# Altium PCB robot.PCBDOC (part 2 of 2)
Units mm, origin at the board's own origin, x right, y up, seen from the top; angles counter-clockwise.
Board outline 152.4 x 101.6 mm, 2 copper layers (Top Layer, Bottom Layer); 107 components, 0 nets, 589 pads, 29 vias.
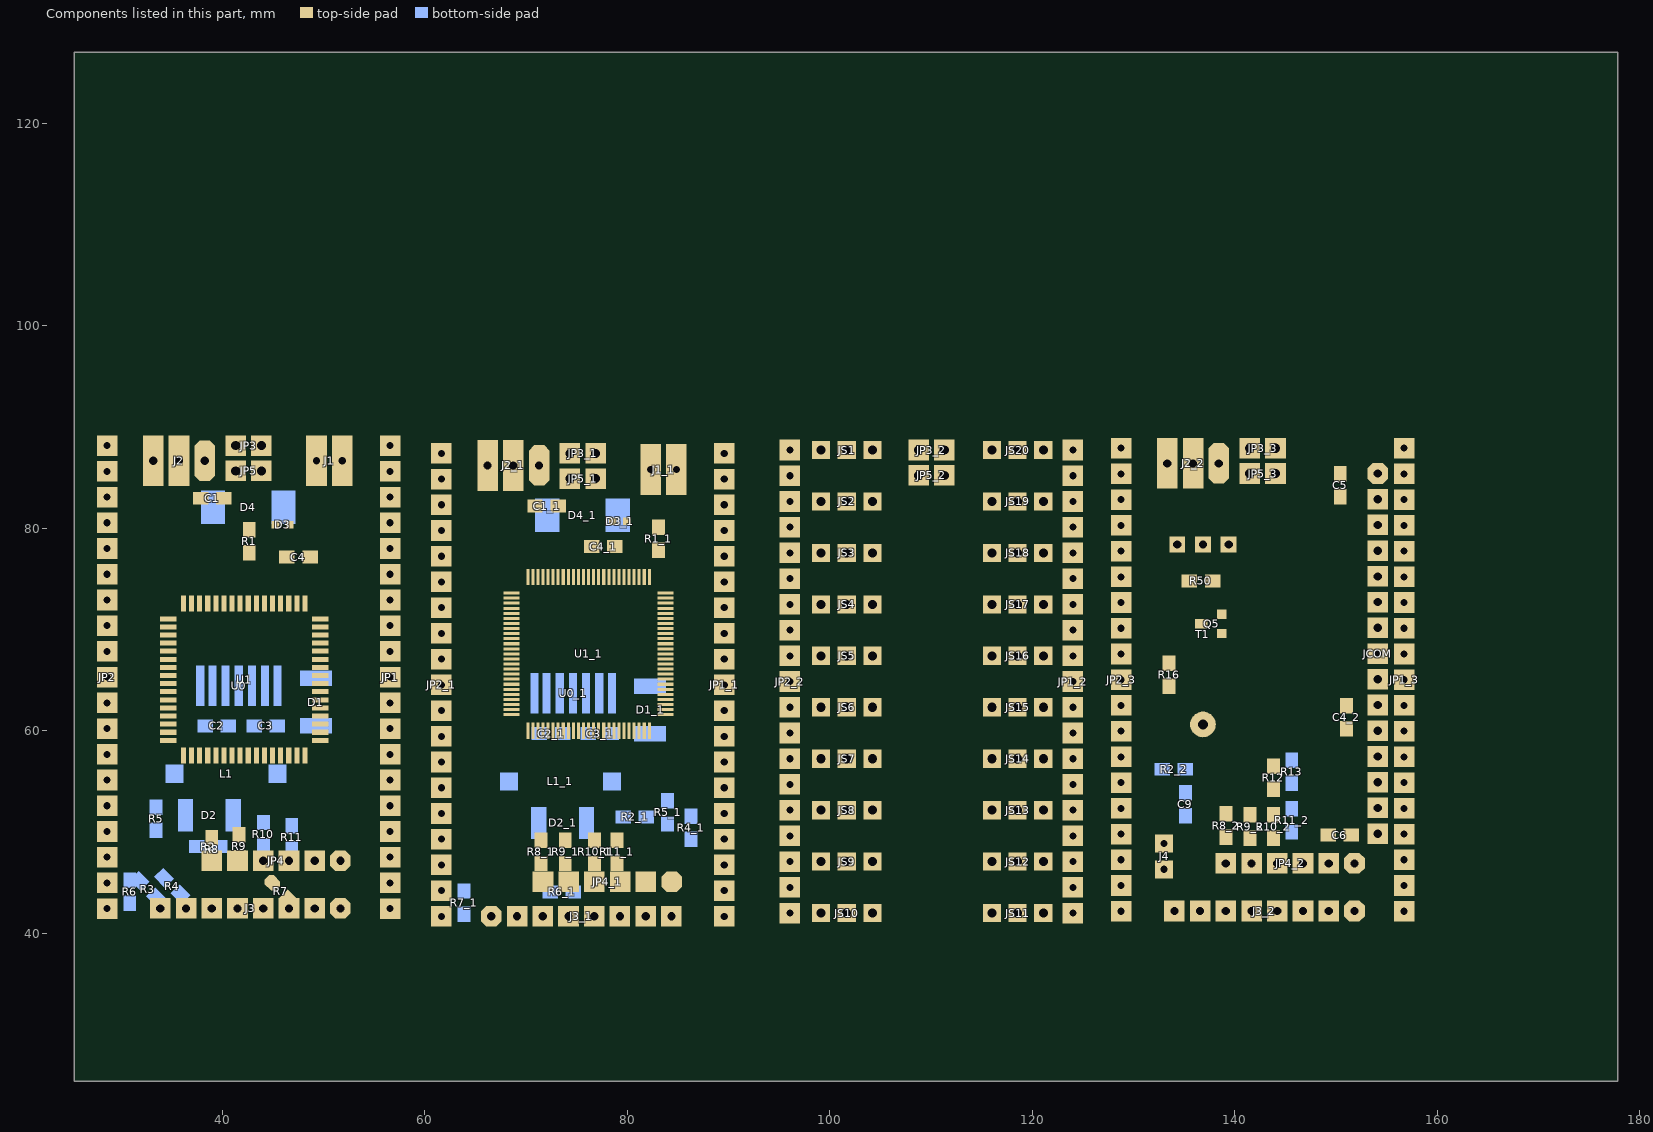
[diagram p2: the components of this part, seen from the top]

## Via types
v1: diameter 1.5, hole 0.711, Top Layer to Bottom Layer, 15 vias
v2: diameter 1.7, hole 0.711, Top Layer to Bottom Layer, 6 vias
v3: diameter 2, hole 0.711, Top Layer to Bottom Layer, 5 vias
v4: diameter 1.8, hole 0.711, Top Layer to Bottom Layer, 2 vias
v5: diameter 1.27, hole 0.711, Top Layer to Bottom Layer, 1 vias

## Nets (pads, with @x,y where several pads share a name; then routed paths per layer and width w, separated by ;. In a path a pad name is that pad's centre, name@x,y a point inside that pad or via, vN(x,y) a via of type N, cw(c..) or ccw(c..) an arc to the next point about the centre after c; other vN are vias at no path point) (continued)
copper on no net: | length 3778.3
  Top Layer w0.3: v1(63.979,59.1) 64.379,58.7 70.379,58.7 70.679,59 70.679,60 ; v1(68.579,49.1) 66.779,49.1 64.379,46.7 64.379,43.8 62.259,41.68 ; 68.579,62.1 70.479,62.1 70.479,70.8 70.179,71.1 67.579,71.1 67.079,71.6 67.079,74.4 67.579,74.9 68.879,74.9 70.479,73.3 76.479,73.3 76.679,73.5 76.679,78 76.479,78.2 76.479,79.8 77.458,80.779 77.9,80.779 ; 68.579,62.6 66.779,62.6 66.679,62.5 66.679,61.8 66.879,61.6 74.679,61.6 ; 68.579,71.6 77.179,71.6 77.179,75.2 ; 69.119,43.4 81.799,43.4 81.839,43.44 81.839,45.1 ; v1@69.119,47.04 v1(69.179,47.1) ; 71.079,61.6 71.079,71.6 ; 71.479,46.9 71.479,45.3 71.679,45.1 ; 71.479,49.186 71.479,51.7 73.679,53.9 73.679,60 ; 73.879,46.9 74.219,46.56 74.219,45.1 ; 73.879,49.186 73.879,51.9 74.179,52.2 74.179,60 ; v1(75.179,50.7) 75.179,50.9 74.679,51.4 74.679,62.7 76.079,64.1 83.779,64.1 ; 75.679,60 75.679,52.2 76.759,51.12 76.759,49.206 76.779,49.186 ; 76.179,60 76.179,52.8 77.537,51.442 78.379,50.6 78.979,50 78.979,49.186 ; 76.759,45.1 76.779,45.12 76.779,46.9 ; 77.179,60 77.179,53.6 80.779,50 v1(80.779,48.1) ; 77.779,82.2 77.779,80.9 77.979,80.7 78.582,80.7 ; 78.979,46.9 78.979,45.42 79.299,45.1 ; 80.179,60 80.179,57.2 82.283,55.096 84.083,55.096 84.579,54.6 v1(87.179,54.6) ; 80.679,60 80.679,57.8 82.579,55.9 v1(85.579,55.9) ; 83.779,63.6 v1(85.779,63.6) ; 61.64,41.68 62.259,41.68 ; 61.64,41.68 62.259,41.68 ; 61.64,41.68 62.259,41.68 ; 61.64,46.76 62.439,46.76 ; 61.64,46.76 62.439,46.76 ; 61.64,46.76 62.439,46.76 ; 61.64,51.84 68.519,51.84 ; 61.64,51.84 68.519,51.84 ; 61.64,51.84 68.519,51.84 ; 61.64,56.92 62.059,56.92 ; 61.64,56.92 62.059,56.92 ; 61.64,56.92 62.059,56.92 ; 61.64,62 65.279,62 ; 61.64,62 65.279,62 ; 61.64,62 65.279,62 ; 61.64,67.08 62.899,67.08 ; 61.64,67.08 62.899,67.08 ; 61.64,67.08 62.899,67.08 ; 61.64,72.16 61.919,72.16 ; 61.64,72.16 61.919,72.16 ; 61.64,72.16 61.919,72.16 ; 61.64,77.24 62.439,77.24 ; 61.64,77.24 62.439,77.24 ; 61.64,77.24 62.439,77.24 ; 61.64,82.32 63.359,82.32 ; 61.64,82.32 63.359,82.32 ; 61.64,82.32 63.359,82.32 ; 61.64,87.4 63.079,87.4 ; 61.64,87.4 63.079,87.4 ; 61.64,87.4 63.079,87.4 ; 61.919,72.16 64.479,69.6 64.479,64.4 65.279,63.6 ; 62.059,56.92 64.079,54.9 69.379,54.9 72.179,57.7 ; 62.439,46.76 66.179,50.5 68.879,50.5 73.179,54.8 ; 62.439,77.24 63.979,75.7 63.979,71.4 65.379,70 65.379,64.8 66.079,64.1 ; 62.899,67.08 63.579,66.4 63.579,64 64.479,63.1 ; 63.079,87.4 63.579,86.9 63.579,83.9 64.679,82.8 64.679,78.4 65.679,77.4 65.679,72 67.079,70.6 67.079,65.6 67.579,65.1 ; 63.359,82.32 63.779,81.9 63.779,77.7 64.879,76.6 64.879,71.7 66.279,70.3 66.279,65.2 66.879,64.6 ; v1(64.079,56.9) 70.079,56.9 ; v1(64.079,56.9) 70.079,56.9 ; v1(64.079,56.9) 70.079,56.9 ; 64.479,63.1 68.579,63.1 ; 64.479,63.1 68.579,63.1 ; 64.479,63.1 68.579,63.1 ; 65.279,62 67.279,60 ; 65.279,63.6 68.579,63.6 ; 65.279,63.6 68.579,63.6 ; 65.279,63.6 68.579,63.6 ; 66.079,64.1 68.579,64.1 ; 66.079,64.1 68.579,64.1 ; 66.079,64.1 68.579,64.1 ; 66.579,41.7 v1(66.579,45.9) ; 66.579,41.7 v1(66.579,45.9) ; 66.579,41.7 v1(66.579,45.9) ; 66.879,64.6 68.579,64.6 ; 66.879,64.6 68.579,64.6 ; 66.879,64.6 68.579,64.6 ; 67.279,60 70.179,60 ; 67.279,60 70.179,60 ; 67.279,60 70.179,60 ; 67.579,65.1 68.579,65.1 ; 67.579,65.1 68.579,65.1 ; 67.579,65.1 68.579,65.1 ; 68.519,51.84 69.179,52.5 72.679,56 ; 70.079,56.9 71.179,58 ; 71.179,58 71.179,60 ; 71.179,58 71.179,60 ; 71.179,58 71.179,60 ; 72.179,57.7 72.179,60 ; 72.179,57.7 72.179,60 ; 72.179,57.7 72.179,60 ; 72.679,56 72.679,60 ; 72.679,56 72.679,60 ; 72.679,56 72.679,60 ; 73.179,54.8 73.179,60 ; 73.179,54.8 73.179,60 ; 73.179,54.8 73.179,60 ; 75.179,60 75.179,61.6 ; 75.179,60 75.179,61.6 ; 75.179,60 75.179,61.6 ; 75.179,61.6 76.379,62.8 80.979,62.8 83.579,60.2 ; 77.179,75.2 77.179,76.4 ; 77.179,75.2 77.179,76.4 ; 77.179,75.2 77.179,76.4 ; 77.179,76.4 77.479,76.7 78.479,76.7 78.765,76.986 ; 77.679,55.3 83.279,49.7 85.879,49.7 86.536,49.043 86.536,46.443 87.279,45.7 87.279,42.1 87.699,41.68 ; 77.679,55.3 77.679,60 ; 77.679,55.3 77.679,60 ; 77.679,55.3 77.679,60 ; 78.179,55.966 83.391,50.753 86.326,50.753 87.379,49.7 87.379,47.66 88.279,46.76 ; 78.179,55.966 78.179,60 ; 78.179,55.966 78.179,60 ; 78.179,55.966 78.179,60 ; 78.679,56.566 82.832,52.413 83.405,51.84 ; 78.679,56.566 78.679,60 ; 78.679,56.566 78.679,60 ; 78.679,56.566 78.679,60 ; 78.765,76.986 78.765,78.2 ; 78.765,76.986 78.765,78.2 ; 78.765,76.986 78.765,78.2 ; 79.679,56.7 v1@82.679,53.7 ; 79.679,56.7 79.679,60 ; 79.679,56.7 79.679,60 ; 79.679,56.7 79.679,60 ; 79.979,80.7 82.479,80.7 ; 79.979,80.7 82.479,80.7 ; 79.979,80.7 82.479,80.7 ; 81.179,58.4 82.279,57.3 89.2,57.3 ; 81.179,58.4 81.179,60 ; 81.179,58.4 81.179,60 ; 81.179,58.4 81.179,60 ; 81.679,59 82.579,58.1 87.079,58.1 87.879,58.9 87.879,60.7 88.479,61.3 89.179,62 ; 81.679,59 81.679,60 ; 81.679,59 81.679,60 ; 81.679,59 81.679,60 ; 82.179,59.8 83.179,58.8 86.679,58.8 87.092,59.213 87.092,61.113 87.779,61.8 87.779,66.6 88.259,67.08 ; 82.179,59.8 82.179,60 ; 82.179,59.8 82.179,60 ; 82.179,59.8 82.179,60 ; 82.179,75.2 82.579,75.2 ; 82.179,75.2 82.579,75.2 ; 82.179,75.2 82.579,75.2 ; 82.479,80.7 83.079,80.1 ; 82.479,80.7 83.079,80.1 ; 82.479,80.7 83.079,80.1 ; 82.579,75.2 83.079,75.7 ; v1@82.679,48 v1@83.179,48 ; v1@82.679,48 v1@83.179,48 ; v1@82.679,48 v1@83.179,48 ; v1@82.679,53.7 v1(83.179,53.7) ; v1@82.679,53.7 v1(83.179,53.7) ; v1@82.679,53.7 v1(83.179,53.7) ; 83.079,75.7 83.079,77.814 ; 83.079,75.7 83.079,77.814 ; 83.079,75.7 83.079,77.814 ; v1@83.179,48 84.379,46.8 ; 83.405,51.84 89.58,51.84 ; 83.405,51.84 89.58,51.84 ; 83.405,51.84 89.58,51.84 ; 83.579,60.2 v1(85.379,60.2) ; 83.579,60.2 v1(85.379,60.2) ; 83.579,60.2 v1(85.379,60.2) ; 83.779,61.6 85.979,61.6 ; 83.779,61.6 85.979,61.6 ; 83.779,61.6 85.979,61.6 ; 83.779,64.6 84.779,64.6 ; 83.779,64.6 84.779,64.6 ; 83.779,64.6 84.779,64.6 ; 83.779,67.6 85.879,67.6 ; 83.779,67.6 85.879,67.6 ; 83.779,67.6 85.879,67.6 ; 83.779,68.1 85.379,68.1 ; 83.779,68.1 85.379,68.1 ; 83.779,68.1 85.379,68.1 ; 83.779,68.6 84.879,68.6 ; 83.779,68.6 84.879,68.6 ; 83.779,68.6 84.879,68.6 ; 84.379,45.1 84.379,46.8 ; 84.379,45.1 84.379,46.8 ; 84.379,45.1 84.379,46.8 ; 84.779,64.6 v1@85.679,65.5 ; 84.879,68.6 85.279,69 85.279,80.4 87.579,82.7 87.579,87 87.979,87.4 ; 85.379,68.1 86.079,68.8 86.079,79.8 88.599,82.32 ; v1@85.679,65.5 v1(85.679,65.8) ; v1@85.679,65.5 v1(85.679,65.8) ; v1@85.679,65.5 v1(85.679,65.8) ; 85.879,67.6 86.879,68.6 86.879,76.5 87.619,77.24 ; 85.979,61.6 86.979,62.6 86.979,67.4 87.679,68.1 87.679,71.6 88.239,72.16 ; 87.619,77.24 89.58,77.24 ; 87.619,77.24 89.58,77.24 ; 87.619,77.24 89.58,77.24 ; 87.699,41.68 89.58,41.68 ; 87.699,41.68 89.58,41.68 ; 87.699,41.68 89.58,41.68 ; 87.979,87.4 89.58,87.4 ; 87.979,87.4 89.58,87.4 ; 87.979,87.4 89.58,87.4 ; 88.239,72.16 89.58,72.16 ; 88.239,72.16 89.58,72.16 ; 88.239,72.16 89.58,72.16 ; 88.259,67.08 89.58,67.08 ; 88.259,67.08 89.58,67.08 ; 88.259,67.08 89.58,67.08 ; 88.279,46.76 89.58,46.76 ; 88.279,46.76 89.58,46.76 ; 88.279,46.76 89.58,46.76 ; 88.599,82.32 89.58,82.32 ; 88.599,82.32 89.58,82.32 ; 88.599,82.32 89.58,82.32 ; 89.179,62 89.58,62 ; 89.179,62 89.58,62 ; 89.179,62 89.58,62 ; 89.2,57.3 89.58,56.92 ; 89.2,57.3 89.58,56.92 ; 89.2,57.3 89.58,56.92
  Top Layer w0.5: 28.639,42.442 29.058,42.442 30.978,44.362 30.978,46.562 37.778,53.362 37.778,57.562 ; v1@31.278,41.862 31.278,42.062 v1@31.328,42.112 ; v1(31.278,42.162) 31.978,42.862 ; v2(31.478,71.062) 32.678,71.062 33.478,70.262 34.678,70.262 ; 31.978,42.762 31.978,43.862 32.378,44.262 43.578,44.262 44.058,43.782 44.058,42.462 ; v2(32.278,68.962) 32.778,69.462 34.678,69.462 ; v4@33.278,45.862 33.478,45.862 34.078,45.262 44.678,45.262 44.962,44.978 ; v2(33.478,57.662) 32.878,58.262 32.878,63.062 34.678,63.062 ; v3(33.778,74.762) 36.378,74.762 36.978,74.162 36.978,72.562 ; v2(35.778,48.362) 35.878,48.262 35.878,48.762 38.578,51.462 38.578,57.562 ; 36.178,72.562 36.178,70.862 36.478,70.562 45.578,70.562 45.778,70.762 45.778,76.362 46.478,77.062 46.478,77.076 ; 37.678,70.562 37.778,70.662 37.778,72.562 ; 38.978,49.362 39.021,49.405 ; 39.064,49.448 38.978,49.448 38.978,49.862 40.278,51.162 49.078,51.162 49.078,55.662 48.978,55.762 47.878,55.762 47.378,56.262 47.378,57.562 ; 39.378,70.562 39.378,53.662 40.178,52.862 v4(42.178,52.862) ; 40.178,57.562 40.178,58.962 43.678,62.462 43.678,67.562 44.778,68.662 53.078,68.662 v3(53.178,68.762) ; 41.518,47.162 41.678,47.322 41.678,47.462 ; 41.518,49.502 41.721,49.705 ; 41.678,49.748 41.992,50.062 50.178,50.062 50.178,57.562 48.178,57.562 ; 44.178,57.562 44.178,54.262 45.778,52.662 46.178,52.662 v2(45.978,52.762) ; 44.978,57.562 44.978,56.362 46.878,54.462 47.278,54.462 47.478,54.262 v2(47.478,54.162) ; 28.639,67.842 28.659,67.862 28.639,67.842 ; 28.639,67.842 29.998,67.842 ; 28.639,67.842 29.998,67.842 ; 29.238,47.522 30.342,48.625 36.978,55.262 ; 29.238,47.522 28.639,47.522 29.238,47.522 ; 29.438,72.922 31.078,74.562 31.078,75.762 32.178,76.862 36.247,76.862 38.578,74.531 ; 29.438,72.922 28.639,72.922 29.438,72.922 ; 29.878,88.162 30.778,87.262 30.778,84.362 32.378,82.762 32.378,81.362 32.778,80.962 36.778,80.962 40.978,76.762 ; 29.878,88.162 28.639,88.162 29.878,88.162 ; 29.978,62.762 31.078,63.862 ; 29.978,62.762 28.639,62.762 29.978,62.762 ; 29.998,67.842 31.178,66.662 32.278,66.662 33.478,67.862 ; 30.058,57.682 31.678,56.062 34.278,56.062 35.178,56.962 35.178,58.862 34.978,59.062 ; 30.058,57.682 28.639,57.682 30.058,57.682 ; 30.058,83.082 30.878,82.262 30.878,80.762 31.978,79.662 36.378,79.662 40.178,75.862 ; 30.058,83.082 28.639,83.082 30.058,83.082 ; 31.078,63.862 34.678,63.862 31.078,63.862 ; 32.618,52.602 36.178,56.162 ; 32.618,52.602 28.639,52.602 32.618,52.602 ; 33.478,67.862 34.678,67.862 33.478,67.862 ; 34.978,59.062 34.678,59.062 34.978,59.062 ; 36.178,56.162 36.178,57.562 36.178,56.162 ; 36.638,78.002 39.378,75.262 ; 36.638,78.002 28.639,78.002 36.638,78.002 ; 36.978,55.262 36.978,57.562 36.978,55.262 ; 38.578,74.531 38.578,72.562 38.578,74.531 ; 39.378,75.262 39.378,72.562 39.378,75.262 ; 40.178,75.862 40.178,72.562 40.178,75.862 ; 40.978,76.762 40.978,72.562 40.978,76.762 ; 41.778,75.462 42.678,76.362 ; 41.778,75.462 41.778,72.562 41.778,75.462 ; 42.678,76.362 42.678,77.576 42.678,76.362 ; 43.178,80.362 42.678,79.862 43.178,80.362 ; 43.178,80.362 45.278,80.362 43.178,80.362 ; 44.478,78.862 44.478,74.862 44.978,74.362 ; 44.478,78.862 48.678,78.862 ; 44.478,78.862 48.678,78.862 ; 44.978,74.362 44.978,72.562 44.978,74.362 ; 46.478,77.076 46.392,77.162 46.478,77.076 ; 46.578,74.562 47.178,75.162 49.778,75.162 53.278,78.662 53.278,82.862 54.478,84.062 54.478,87.662 54.978,88.162 ; 46.578,74.562 46.578,72.562 46.578,74.562 ; 47.378,73.862 47.678,74.162 50.278,74.162 54.478,78.362 54.478,82.162 55.398,83.082 ; 47.378,73.862 47.378,72.562 47.378,73.862 ; 48.578,80.362 46.675,80.362 48.578,80.362 ; 48.578,80.362 48.678,80.262 ; 48.578,80.362 48.678,80.262 ; 48.678,77.162 48.678,78.862 ; 48.678,77.162 48.678,78.862 ; 48.678,77.162 48.678,80.262 ; 48.678,77.162 48.678,82.962 48.678,80.262 ; 48.678,78.862 48.678,80.262 ; 50.478,72.562 55.918,78.002 ; 50.478,72.562 48.178,72.562 50.478,72.562 ; 51.178,60.662 51.278,60.562 51.278,51.962 53.278,49.962 53.278,48.562 54.278,47.562 54.278,43.062 54.898,42.442 ; 51.178,60.662 49.678,60.662 51.178,60.662 ; 51.878,61.462 52.278,61.062 52.278,52.962 54.478,50.762 54.478,49.162 56.118,47.522 ; 51.878,61.462 49.678,61.462 51.878,61.462 ; 52.178,64.662 55.358,67.842 ; 52.178,64.662 49.678,64.662 52.178,64.662 ; 52.378,71.062 54.238,72.922 ; 52.378,71.062 49.678,71.062 52.378,71.062 ; 52.578,62.262 53.378,61.462 53.378,53.862 54.638,52.602 ; 52.578,62.262 49.678,62.262 52.578,62.262 ; 53.378,63.062 54.478,61.962 54.478,58.362 55.158,57.682 ; 53.378,63.062 49.678,63.062 53.378,63.062 ; 54.078,63.862 55.178,62.762 ; 54.078,63.862 49.678,63.862 54.078,63.862 ; 54.238,72.922 56.579,72.922 54.238,72.922 ; 54.638,52.602 56.579,52.602 54.638,52.602 ; 54.898,42.442 56.579,42.442 54.898,42.442 ; 54.978,88.162 56.579,88.162 54.978,88.162 ; 55.158,57.682 56.579,57.682 55.158,57.682 ; 55.178,62.762 56.579,62.762 55.178,62.762 ; 55.358,67.842 56.579,67.842 55.358,67.842 ; 55.398,83.082 56.579,83.082 55.398,83.082 ; 55.918,78.002 56.579,78.002 55.918,78.002 ; 56.118,47.522 56.579,47.522 56.118,47.522
  Top Layer w0.8: 33.178,85.962 33.178,84.262 ; 66.179,85 66.179,83.5 ; v5(67.279,80.5) 67.279,80 67.979,79.3 72.579,79.3 74.278,80.999 74.278,82.2 ; 69.229,83.55 70.579,82.2 ; 73.179,82.2 74.278,82.2 ; 74.339,84.9 74.339,82.74 74.879,82.2 83.979,82.2 84.859,83.08 84.859,85.8 ; 74.34,84.901 74.34,87.4 ; 74.579,82.5 74.278,82.2 ; 33.178,84.262 33.678,84.262 35.778,84.262 ; 33.178,84.262 35.778,84.262 ; 33.178,84.262 36.178,84.262 35.778,84.262 ; 35.778,84.262 35.778,85.962 35.778,84.262 ; 35.778,84.262 35.828,84.312 36.228,84.312 37.578,82.962 ; 37.578,82.962 37.892,82.962 37.578,82.962 ; 41.277,82.962 40.178,82.962 41.277,82.962 ; 41.277,82.962 41.578,83.262 ; 41.277,82.962 41.578,83.262 ; 41.338,83.502 41.338,85.662 41.338,83.502 ; 41.338,83.502 41.578,83.262 ; 41.338,83.502 41.878,82.962 ; 41.338,83.502 41.578,83.262 ; 41.578,83.262 41.878,82.962 ; 41.878,82.962 48.678,82.962 ; 41.878,82.962 48.678,82.962 ; 41.878,82.962 50.978,82.962 ; 48.678,82.962 50.978,82.962 ; 50.978,82.962 51.858,83.842 ; 51.858,83.842 51.858,86.662 51.858,83.842 ; 66.179,83.5 66.679,83.5 68.779,83.5 ; 66.179,83.5 69.179,83.5 68.779,83.5 ; 68.779,83.5 68.779,85.2 68.779,83.5 ; 70.579,82.2 70.893,82.2 ; 70.579,82.2 70.893,82.2 ; 70.579,82.2 70.893,82.2 ; 76.88,84.901 76.88,87.4 ; 76.88,84.901 76.88,87.4 ; 76.88,84.901 76.88,87.4 ; 33.211,87.146 35.751,87.146 33.211,87.146 ; 41.339,85.663 41.339,88.162 41.339,85.663 ; 43.879,85.663 43.879,88.162 43.879,85.663 ; 66.212,86.384 68.752,86.384 66.212,86.384
  Top Layer w1: 69.119,41.7 v1@69.119,47.04 ; 132.608,63.708 131.808,62.908 131.808,58.108 131.908,58.008 132.808,58.008 132.808,63.308 133.308,62.808 133.308,58.108 133.708,58.108 134.308,58.708 134.308,63.008 133.808,63.508 ; 139.408,53.508 139.408,54.608 139.308,54.708 138.708,54.708 138.508,54.508 138.508,53.608 139.108,53.008 ; 141.908,53.308 141.908,54.608 141.808,54.708 141.008,54.708 141.008,53.308 141.108,53.208 141.208,53.208 141.508,52.908 ; 151.808,42.708 151.808,46.308 ; 133.508,63.508 133.808,63.508 ; 133.508,63.508 133.508,64.408 ; 133.508,63.508 133.508,64.408 ; 133.508,63.508 133.808,63.508 ; 133.508,63.508 133.508,64.408 ; 133.508,66.694 137.394,66.694 ; 133.508,66.694 137.394,66.694 ; 133.508,66.694 137.394,66.694 ; 134.308,75.508 135.008,74.808 ; 134.308,75.508 134.308,78.408 ; 134.308,75.508 134.308,78.408 ; 134.308,75.508 134.308,78.408 ; 134.688,46.328 135.108,46.748 135.108,56.808 136.508,58.208 140.508,58.208 142.268,59.968 ; 134.688,46.328 133.008,46.328 134.688,46.328 ; 135.008,74.808 135.508,74.808 ; 135.008,74.808 135.508,74.808 ; 135.008,74.808 135.508,74.808 ; 135.508,70.708 135.643,70.573 ; 135.508,70.708 135.508,74.808 ; 135.508,70.708 135.508,74.808 ; 135.508,70.708 135.508,74.808 ; 135.643,70.573 136.676,70.573 ; 135.643,70.573 136.676,70.573 ; 135.643,70.573 136.676,70.573 ; 135.868,84.548 139.388,81.028 ; 135.868,84.548 135.868,86.408 ; 135.868,84.548 135.868,86.408 ; 135.868,84.548 135.868,86.408 ; 137.394,66.694 138.708,68.008 ; 137.408,56.508 136.708,55.808 136.708,44.708 136.908,44.508 144.008,44.508 144.188,44.328 ; 137.408,56.508 143.808,56.508 ; 137.408,56.508 143.808,56.508 ; 137.408,56.508 143.808,56.508 ; 137.794,74.808 138.608,74.808 ; 137.794,74.808 138.608,74.808 ; 137.794,74.808 138.608,74.808 ; 138.608,74.808 139.388,75.588 ; 138.708,68.008 138.708,69.608 ; 138.708,68.008 138.708,69.608 ; 138.708,68.008 138.708,69.608 ; 139.108,46.908 139.108,49.508 ; 139.108,46.908 139.108,49.508 ; 139.108,46.908 139.108,49.508 ; 139.108,51.794 139.108,53.008 ; 139.108,51.794 139.108,53.008 ; 139.108,51.794 139.108,53.008 ; 139.388,75.588 139.388,78.408 ; 139.388,75.588 139.388,81.028 ; 139.388,75.588 139.388,81.028 ; 139.388,75.588 139.388,78.408 ; 139.388,75.588 139.388,78.408 ; 139.388,78.408 139.388,81.028 ; 140.113,71.513 141.908,73.308 ; 140.113,71.513 138.708,71.513 140.113,71.513 ; 141.468,82.829 141.901,82.396 ; 141.468,82.829 141.468,85.408 141.468,82.829 ; 141.469,82.947 141.908,82.508 ; 141.469,82.947 141.469,85.408 141.469,87.908 141.469,82.947 ; 141.508,49.408 141.648,49.268 ; 141.508,49.408 141.648,49.268 ; 141.508,49.408 141.648,49.268 ; 141.508,51.694 141.508,52.908 ; 141.508,51.694 141.508,52.908 ; 141.508,51.694 141.508,52.908 ; 141.648,46.908 141.648,49.268 ; 141.648,46.908 141.648,49.268 ; 141.648,46.908 141.648,49.268 ; 141.901,82.396 141.908,82.396 ; 141.901,82.396 147.438,82.396 ; 141.908,73.308 141.908,82.396 ; 141.908,73.308 141.908,82.508 ; 141.908,82.396 147.438,82.396 ; 141.908,82.396 141.908,82.408 ; 141.908,82.408 141.908,82.508 ; 141.908,82.408 148.808,82.408 ; 141.908,82.408 149.708,82.408 ; 142.268,59.968 v3@149.248,59.968 ; 142.268,59.968 150.768,59.968 ; 143.808,48.208 144.188,47.828 ; 143.808,48.208 143.808,49.408 ; 143.808,48.208 143.808,49.408 ; 143.808,48.208 143.808,49.408 ; 143.808,51.694 143.808,54.222 ; 143.808,51.694 144.502,52.388 ; 143.808,51.694 144.502,52.388 ; 143.808,51.694 143.808,54.222 ; 143.808,51.694 144.502,52.388 ; 143.808,51.694 143.808,54.222 ; 144.188,42.208 144.188,44.328 ; 144.188,42.208 144.188,44.328 ; 144.188,42.208 144.188,44.328 ; 144.188,46.908 144.188,47.828 ; 144.188,46.908 144.188,47.828 ; 144.188,46.908 144.188,47.828 ; 144.502,52.388 154.108,52.388 ; 144.502,52.388 154.108,52.388 ; 144.502,52.388 154.108,52.388 ; 147.438,82.396 148.808,81.026 ; 147.438,82.396 148.848,80.986 ; v3@148.808,60.408 v3@149.248,59.968 ; v3@148.808,60.408 148.808,81.026 ; v3@148.808,60.408 148.808,82.408 ; v3@148.808,60.408 v3@149.248,59.968 ; 148.808,81.026 148.848,80.986 ; 148.808,81.026 148.808,82.408 ; 148.808,82.408 149.708,82.408 ; 148.848,70.168 148.848,80.986 ; 148.848,70.168 154.108,70.168 148.848,70.168 ; 149.208,46.968 149.268,46.908 ; 149.208,46.968 149.208,49.708 ; 149.208,46.968 149.208,49.708 ; 149.208,46.968 149.268,46.908 ; 149.208,46.968 149.208,49.708 ; 149.208,46.968 149.268,46.908 ; v3@149.248,59.968 v3(149.268,59.968) 150.768,59.968 ; 149.268,46.908 149.268,42.208 149.268,46.908 ; 149.708,82.408 150.408,83.108 ; 149.708,82.408 150.408,83.108 ; 150.408,83.108 150.648,82.868 ; 150.408,83.108 150.648,82.868 ; 150.422,85.408 154.108,85.408 ; 150.422,85.408 154.108,85.408 ; 150.422,85.408 154.108,85.408 ; 150.648,82.868 154.108,82.868 150.648,82.868 ; 150.768,59.968 151.008,60.208 ; 150.768,59.968 151.008,60.208 ; 151.008,60.208 151.208,60.008 ; 151.008,60.208 151.208,60.008 ; 151.008,62.494 151.062,62.548 ; 151.008,62.494 151.062,62.548 ; 151.008,62.494 151.062,62.548 ; 151.062,62.548 154.108,62.548 ; 151.062,62.548 154.108,62.548 ; 151.062,62.548 154.108,62.548 ; 151.208,60.008 154.108,60.008 151.208,60.008 ; 151.494,49.708 151.808,49.394 ; 151.494,49.708 151.634,49.848 ; 151.494,49.708 151.634,49.848 ; 151.494,49.708 151.808,49.394 ; 151.494,49.708 151.634,49.848 ; 151.494,49.708 151.808,49.394 ; 151.634,49.848 154.108,49.848 ; 151.634,49.848 154.108,49.848 ; 151.634,49.848 154.108,49.848 ; 151.808,46.908 151.808,49.394 ; 151.808,46.908 151.808,49.394 ; 151.808,46.908 151.808,49.394 ; 49.138,42.462 49.138,47.162 49.138,42.462 ; 144.008,85.408 144.008,87.408 144.008,85.408
  Top Layer w1.8: 96.205,87.727 99.005,87.727 ; 96.375,77.567 98.915,77.567 ; 96.405,62.327 98.885,62.327 ; 96.475,67.407 98.965,67.407 ; 96.515,57.247 98.885,57.247 ; 96.535,42.007 98.975,42.007 ; 96.535,52.167 98.995,52.167 ; 96.545,47.087 98.975,47.087 ; 96.555,72.487 98.885,72.487 ; 96.605,82.647 99.015,82.647 ; 101.665,42.157 101.665,87.357 ; v3(101.665,80.107) v3(118.545,80.107) ; 104.205,42.267 104.205,77.337 ; 104.205,82.647 104.205,87.527 ; 108.765,85.517 108.765,87.527 ; 111.305,80.107 111.305,87.537 ; 116.005,42.417 116.005,77.217 ; 116.005,82.647 116.005,87.477 ; 118.545,42.367 118.545,87.507 ; 121.215,42.007 123.805,42.007 ; 121.215,87.727 123.665,87.727 ; 121.235,77.567 123.645,77.567 ; 121.245,67.407 123.725,67.407 ; 121.245,72.487 123.725,72.487 ; 121.255,82.647 123.605,82.647 ; 121.275,47.087 123.835,47.087 ; 121.295,52.167 123.785,52.167 ; 121.305,57.247 123.765,57.247 ; 121.305,62.327 123.805,62.327
  Bottom Layer w0.3: 49.25,64.69 49.25,65.185 ; 63.779,44.8 v1@63.779,56.6 ; 63.879,41.9 64.179,41.9 65.779,43.5 70.379,43.5 71.659,42.22 71.659,41.7 ; v1(63.979,59.1) 64.179,59.1 64.779,58.5 65.529,57.75 65.579,57.7 65.579,55.8 64.779,55 64.779,45.4 65.779,44.4 72.093,44.4 72.393,44.1 ; v1(68.579,49.1) 69.379,49.1 69.579,48.9 70.079,48.4 72.979,48.4 73.779,47.6 80.579,47.6 80.779,47.8 v1(80.779,48.1) ; v1(69.179,47.1) v1@69.579,46.7 ; 71.329,60.55 71.19,60.55 ; 74.199,41.7 74.199,43.62 74.679,44.1 ; v1(75.179,50.7) 75.379,50.9 75.979,50.9 75.979,50 ; 76.739,41.7 76.739,42.96 78.379,44.6 81.479,44.6 84.179,47.3 84.179,48.5 81.879,50.8 81.879,52.6 81.479,53 81.479,55.2 81.979,55.7 84.078,55.7 84.078,56.999 85.328,58.249 87.079,60 87.079,62.3 v1(85.779,63.6) ; 79.279,41.7 79.279,42.9 80.279,43.9 82.079,43.9 85.079,46.9 85.079,48.9 83.979,50 83.979,50.8 ; 81.819,41.7 81.819,42.24 86.279,46.7 86.279,49.3 ; 84.359,41.7 84.759,41.3 87.279,41.3 ; v1(85.579,55.9) 85.579,53.9 86.279,53.2 86.279,51.586 ; v1(87.179,54.6) 87.579,54.2 87.579,43.8 87.365,43.586 87.279,43.586 ; 32.978,86.462 33.437,86.92 ; 32.978,86.462 33.437,86.92 ; 32.978,86.462 33.678,87.162 33.437,86.92 ; v1@63.779,56.6 v1(64.079,56.9) ; v1@63.779,56.6 v1(64.079,56.9) ; v1@63.779,56.6 v1(64.079,56.9) ; 65.979,83.5 65.979,85.7 ; 65.979,83.5 65.979,87.192 ; 65.979,83.5 65.979,87.192 ; 65.979,83.5 65.979,86.384 ; 65.979,83.5 65.979,86.384 ; 65.979,83.5 65.979,85.7 ; 65.979,85.7 65.979,86.384 ; 65.979,85.7 66.438,86.158 ; 65.979,85.7 66.679,86.4 ; 65.979,85.7 66.679,86.4 ; 65.979,85.7 66.438,86.158 ; 65.979,85.7 66.438,86.158 ; 65.979,86.384 65.979,87.192 ; 66.438,86.158 66.679,86.4 ; v1(66.579,45.9) v1@66.979,45.5 ; v1(66.579,45.9) v1@66.979,45.5 ; v1(66.579,45.9) v1@66.979,45.5 ; v1@66.979,45.5 80.979,45.5 82.679,47.2 ; 71.19,59.724 71.329,59.724 ; 71.19,59.724 71.19,60.55 ; 71.19,59.724 71.19,60.55 ; 71.19,59.724 71.329,59.724 ; 71.19,59.724 71.19,60.55 ; 71.19,59.724 71.329,59.724 ; 75.379,49 v1@75.379,50.3 ; 75.379,49 v1@75.379,50.3 ; 75.379,49 v1@75.379,50.3 ; 79.593,51.286 v1@82.379,48.5 ; 79.593,51.286 79.593,51.5 ; 79.593,51.286 79.593,51.5 ; 79.593,51.286 79.593,51.5 ; 82.251,63.928 v1@85.379,60.8 ; 82.251,63.928 82.251,64.423 ; 82.251,63.928 82.251,64.423 ; 82.251,63.928 82.251,64.423 ; v1@82.379,48.5 v1@82.679,48.5 ; v1@82.379,48.5 v1@82.679,48.5 ; v1@82.379,48.5 v1@82.679,48.5 ; 82.679,47.2 v1@82.679,48 ; 82.679,47.2 v1@82.679,48.5 ; 82.679,47.2 v1@82.679,48.5 ; 82.679,47.2 v1@82.679,48 ; 82.679,47.2 v1@82.679,48 ; v1@82.679,48 v1@82.679,48.5 ; v1(85.379,60.2) v1@85.379,60.8 ; v1(85.379,60.2) v1@85.379,60.8 ; v1(85.379,60.2) v1@85.379,60.8
  Bottom Layer w0.5: 30.878,42.962 30.878,42.562 v1(31.278,42.162) v1@31.278,41.862 ; v2(31.478,71.062) 31.178,71.062 30.478,70.362 30.478,45.648 30.948,45.178 31.862,45.178 ; v2(32.278,68.962) 31.833,68.517 31.833,47.707 33.278,46.262 v4(33.478,46.262) 34.262,45.478 ; v4@33.278,45.862 33.711,45.429 34.111,45.429 ; v2@33.378,57.562 v2(33.478,57.662) 33.478,52.448 ; 33.478,43.562 33.898,43.142 33.898,42.462 ; 33.478,50.162 33.478,48.462 37.278,44.662 37.578,44.662 38.978,43.262 38.978,42.462 ; v3(33.778,74.762) 43.94,74.762 46.009,72.693 46.055,72.739 ; 35.878,43.862 36.438,43.302 36.438,42.462 ; 37.478,48.562 35.978,48.562 v2(35.778,48.362) 36.178,48.362 36.728,47.812 41.518,43.022 41.518,42.462 ; 40.078,48.562 41.078,49.262 41.078,51.662 ; 44.058,47.162 44.078,47.182 44.078,48.662 ; 44.078,50.948 44.078,51.262 45.578,52.762 v2(45.978,52.762) ; 46.598,47.162 46.878,47.442 46.878,48.362 ; 46.878,50.648 47.092,50.862 48.178,50.862 48.178,53.462 v2(47.478,54.162) v2@47.678,54.162 ; 39.764,46.876 42.078,44.562 51.278,44.562 ; 39.764,46.876 39.764,48.562 39.764,46.876 ; 51.278,44.562 51.678,44.162 51.278,44.562
  Bottom Layer w0.8: 32.978,86.462 32.978,84.462 33.072,84.368 ; 33.072,85.956 33.072,84.368 ; 35.278,87.162 33.678,87.162 33.678,87.146 33.678,84.262 ; 39.764,48.562 40.078,48.562 ; 41.078,51.662 41.078,51.762 v4(42.178,52.862) ; 44.778,69.362 44.778,71.462 51.858,78.542 51.858,86.662 ; 49.138,47.162 49.138,48.722 53.278,52.862 53.278,65.662 52.578,66.362 49.25,66.362 ; 49.25,65.185 49.25,68.49 48.378,69.362 42.278,69.362 41.638,68.722 41.638,61.822 40.614,60.798 ; 52.378,66.362 52.378,67.962 v3(53.178,68.762) ; 65.979,85.7 65.979,83.5 66.679,83.5 68.779,83.5 68.765,86.286 68.765,86.371 ; 66.679,86.4 68.279,86.4 ; v5(67.279,80.5) 65.479,80.5 64.579,79.6 64.579,61.1 66.679,59 66.679,55.2 66.179,54.7 66.179,49 68.079,47.1 v1(69.179,47.1) ; 71.329,60.55 72.039,61.26 ; 75.979,50.9 78.993,50.9 ; 33.072,84.368 33.072,84.262 33.178,84.262 ; 33.072,84.368 33.178,84.262 ; 33.178,84.262 33.678,84.262 ; 33.678,84.262 35.778,84.262 35.764,87.048 35.764,87.133 ; 35.318,52.722 35.318,55.762 ; 35.318,52.722 36.379,51.662 35.318,52.722 ; 35.318,52.722 35.318,55.762 ; 35.318,52.722 35.318,56.302 ; 35.318,55.762 35.318,56.302 ; 35.318,56.302 38.328,59.312 ; 35.764,87.133 35.751,87.146 35.764,87.133 ; 38.291,84.849 39.103,84.037 ; 38.291,84.849 38.291,87.146 38.291,84.849 ; 38.328,59.312 38.328,60.486 ; 38.328,59.312 38.328,60.486 ; 38.328,60.486 39.038,62.022 ; 38.328,60.486 39.038,62.022 ; 38.328,60.486 36.702,60.486 36.078,61.11 36.078,64.962 34.578,66.462 34.578,71.962 34.078,72.462 32.378,72.462 31.178,73.662 31.178,75.662 33.778,78.262 33.778,78.296 33.978,78.462 40.978,78.462 42.578,80.062 42.578,83.162 43.878,84.462 ; 39.038,62.022 39.038,64.462 39.038,62.022 ; 39.103,84.037 39.103,82.062 39.103,84.037 ; 40.614,60.798 40.614,60.486 40.614,60.798 ; 42.938,60.702 43.154,60.486 42.938,60.702 ; 42.938,60.702 42.938,64.462 42.938,60.702 ; 43.878,84.462 43.878,85.662 43.878,84.462 ; 45.44,55.8 45.478,55.762 45.44,55.8 ; 45.44,55.8 45.44,60.486 ; 45.44,55.8 45.44,60.486 ; 45.44,60.486 45.478,60.524 ; 45.44,60.486 45.478,60.524 ; 45.478,60.524 45.478,64.462 45.478,60.524 ; 45.478,60.524 45.516,60.486 ; 45.478,60.524 45.516,60.486 ; 45.516,60.486 49.25,60.486 45.516,60.486 ; 47.078,82.062 49.318,84.302 ; 47.078,82.062 46.053,82.062 47.078,82.062 ; 49.318,84.302 49.318,86.662 49.318,84.302 ; 66.779,61.144 66.779,77.534 66.979,77.7 73.979,77.7 75.579,79.3 75.579,82.4 76.879,83.7 ; 66.779,61.144 68.951,58.972 ; 66.779,61.144 68.951,58.972 ; 66.779,61.144 68.951,58.972 ; 66.779,61.144 68.951,58.972 ; 66.779,61.144 68.951,58.972 ; 66.779,61.144 68.951,58.972 ; 66.779,61.144 68.951,58.972 ; 68.319,51.96 69.379,50.9 ; 68.319,51.96 68.319,55 ; 68.319,51.96 68.319,58.34 ; 68.319,51.96 68.319,58.34 ; 68.319,51.96 68.319,55 ; 68.319,51.96 68.319,55 ; 68.319,55 68.319,58.34 ; 68.319,58.34 68.951,58.972 ; 68.319,58.34 69.703,59.724 ; 68.319,58.34 69.703,59.724 ; 68.319,58.34 68.951,58.972 ; 68.319,58.34 68.951,58.972 ; 68.319,58.34 68.951,58.972 ; 68.752,86.384 68.765,86.371 ; 68.752,86.384 68.765,86.371 ; 68.752,86.384 68.765,86.371 ; 68.951,58.972 69.703,59.724 ; 69.379,50.9 71.28,50.9 ; 69.379,50.9 71.28,50.9 ; 69.379,50.9 71.28,50.9 ; 69.703,59.724 71.19,59.724 ; 69.703,59.724 71.329,59.724 ; 69.703,59.724 71.329,59.724 ; 69.703,59.724 71.19,59.724 ; 69.703,59.724 71.19,59.724 ; 71.19,59.724 71.329,59.724 ; 71.292,84.087 72.104,83.275 ; 71.292,84.087 71.292,86.384 ; 71.292,84.087 71.292,86.384 ; 71.292,84.087 71.292,86.384 ; 72.039,61.26 72.039,63.7 ; 72.039,61.26 72.039,63.7 ; 72.039,61.26 72.039,63.7 ; 72.104,81.3 72.104,83.275 ; 72.104,81.3 72.104,83.275 ; 72.104,81.3 72.104,83.275 ; 73.615,59.724 73.615,60.036 ; 73.615,59.724 73.615,60.036 ; 73.615,59.724 73.615,60.036 ; 73.615,60.036 74.639,61.06 ; 74.639,61.06 74.639,63.7 ; 74.639,61.06 74.639,67.96 ; 74.639,61.06 74.639,67.96 ; 74.639,61.06 74.639,63.7 ; 74.639,61.06 74.639,63.7 ; 74.639,63.7 74.639,67.96 ; 74.639,67.96 75.279,68.6 ; 75.279,68.6 77.779,68.6 ; 75.279,68.6 81.379,68.6 ; 75.279,68.6 81.379,68.6 ; 75.279,68.6 77.779,68.6 ; 75.279,68.6 77.779,68.6 ; 75.939,59.94 76.155,59.724 ; 75.939,59.94 75.939,63.7 ; 75.939,59.94 75.939,63.7 ; 75.939,59.94 76.155,59.724 ; 75.939,59.94 75.939,63.7 ; 75.939,59.94 76.155,59.724 ; 76.879,83.7 76.879,84.9 ; 76.879,83.7 76.879,84.9 ; 76.879,83.7 76.879,84.9 ; 77.779,68.6 81.379,68.6 ; 77.779,68.6 77.779,70.7 ; 77.779,68.6 77.779,70.7 ; 77.779,68.6 77.779,70.7 ; 77.779,70.7 84.859,77.78 ; 78.441,55.038 78.479,55 ; 78.441,55.038 78.441,59.724 ; 78.441,55.038 78.441,59.724 ; 78.441,55.038 78.479,55 ; 78.441,55.038 78.441,59.724 ; 78.441,55.038 78.479,55 ; 78.441,59.724 78.479,59.762 ; 78.441,59.724 78.479,59.762 ; 78.441,59.724 78.479,59.762 ; 78.479,59.762 78.479,63.7 ; 78.479,59.762 78.517,59.724 ; 78.479,59.762 78.517,59.724 ; 78.479,59.762 78.479,63.7 ; 78.479,59.762 78.479,63.7 ; 78.479,59.762 78.517,59.724 ; 78.517,59.724 82.251,59.724 ; 78.517,59.724 82.251,59.724 ; 78.517,59.724 82.251,59.724 ; 78.993,50.9 79.593,51.5 ; 78.993,50.9 79.593,51.5 ; 78.993,50.9 79.593,51.5 ; 79.054,81.3 80.079,81.3 ; 79.054,81.3 80.079,81.3 ; 79.054,81.3 80.079,81.3 ; 80.079,81.3 82.319,83.54 ; 81.379,68.6 82.251,67.728 ; 82.251,64.423 83.628,65.8 ; 82.251,64.423 82.251,67.728 ; 82.251,64.423 83.628,65.8 ; 82.251,64.423 82.251,67.728 ; 82.251,64.423 83.628,65.8 ; 82.251,64.423 82.251,67.728 ; 82.319,83.54 82.319,85.8 ; 82.319,83.54 82.319,85.8 ; 82.319,83.54 82.319,85.8 ; 83.628,65.8 v1(85.679,65.8) ; 83.628,65.8 v1(85.679,65.8) ; 83.628,65.8 v1(85.679,65.8) ; 84.859,77.78 84.859,85.8 ; 84.859,77.78 84.859,85.8 ; 84.859,77.78 84.859,85.8
  Bottom Layer w1: 111.306,85.228 111.306,87.727 ; 141.408,87.408 141.408,85.908 ; 149.208,42.808 149.208,46.408 ; 51.678,42.462 51.678,44.162 ; 51.678,42.462 51.678,44.162 ; 51.678,42.462 51.678,47.162 51.678,44.162 ; 132.648,48.868 132.808,49.028 ; 132.648,48.868 133.008,48.868 ; 132.648,48.868 133.008,48.868 ; 132.648,48.868 133.008,48.868 ; 132.808,49.028 132.808,56.208 ; 132.808,49.028 132.808,56.208 ; 132.808,49.028 132.808,56.208 ; 133.008,46.328 134.728,46.328 ; 133.008,46.328 134.728,46.328 ; 133.008,46.328 134.728,46.328 ; 133.328,86.408 135.868,86.408 ; 133.328,86.408 135.868,86.408 ; 133.328,86.408 135.868,86.408 ; 134.728,46.328 135.108,46.708 ; 135.094,56.208 137.108,56.208 ; 135.094,56.208 137.108,56.208 ; 135.094,56.208 137.108,56.208 ; 135.108,46.708 135.108,51.608 ; 135.108,46.708 135.108,51.608 ; 135.108,46.708 135.108,51.608 ; 135.108,53.894 135.108,56.194 ; 135.108,53.894 135.108,56.194 ; 135.108,53.894 135.108,56.194 ; 136.848,80.348 137.108,80.608 148.708,80.608 ; 136.848,80.348 136.848,78.408 136.848,80.348 ; 137.108,56.208 140.108,59.208 146.708,59.208 147.508,58.408 147.508,53.608 147.408,53.508 ; 138.408,84.508 140.208,82.708 143.508,82.708 144.009,83.209 ; 138.408,84.508 138.408,86.408 ; 138.408,84.508 138.408,86.408 ; 138.408,84.508 138.408,86.408 ; 140.808,57.108 136.708,53.008 136.708,44.708 136.908,44.508 146.608,44.508 146.728,44.388 ; 140.808,57.108 145.608,57.108 ; 140.808,57.108 145.608,57.108 ; 140.808,57.108 145.608,57.108 ; 141.408,85.908 141.468,85.908 ; 141.408,85.908 141.468,85.908 ; 141.468,85.908 141.468,85.408 141.468,85.908 ; 144.009,83.209 144.009,85.408 ; 144.009,83.209 144.009,87.908 ; 144.009,83.209 144.009,87.908 ; 144.009,83.209 144.009,85.408 ; 144.009,83.209 144.009,85.408 ; 144.009,85.408 144.009,87.908 ; 145.608,50.008 146.728,48.888 ; 145.608,50.008 146.728,48.888 ; 145.608,50.008 146.728,48.888 ; 145.608,52.294 145.608,53.508 ; 145.608,52.294 145.608,54.822 ; 145.608,52.294 145.608,54.822 ; 145.608,52.294 145.608,53.508 ; 145.608,52.294 145.608,53.508 ; 145.608,53.508 145.608,54.822 ; 145.608,53.508 147.408,53.508 ; 145.608,53.508 147.408,53.508 ; 145.608,53.508 147.408,53.508 ; 146.728,42.208 146.728,44.388 ; 146.728,42.208 146.728,44.388 ; 146.728,42.208 146.728,44.388 ; 146.728,46.908 146.728,48.888 ; 146.728,46.908 146.728,48.888 ; 146.728,46.908 146.728,48.888 ; 148.708,80.608 151.708,77.608 ; 148.708,80.608 148.708,83.208 150.908,85.408 ; 150.908,85.408 154.108,85.408 150.908,85.408 ; 151.708,50.108 151.708,47.508 151.708,77.608 ; 151.708,50.108 151.708,62.308 ; 151.708,50.108 151.968,49.848 ; 151.708,50.108 151.968,49.848 ; 151.708,62.308 151.708,77.608 ; 151.708,62.308 151.948,62.548 ; 151.708,62.308 151.948,62.548 ; 151.948,62.548 154.108,62.548 151.948,62.548 ; 151.968,49.848 154.108,49.848 151.968,49.848 ; 149.268,46.908 v3(149.268,59.968) 149.268,46.908 ; 151.808,42.208 151.808,46.908 151.808,42.208
  Bottom Layer w1.8: 96.066,42.007 99.125,42.007 ; 96.066,47.087 99.125,47.087 ; 96.066,52.167 99.125,52.167 ; 96.066,57.247 99.125,57.247 ; 96.066,62.327 99.125,62.327 ; 96.066,67.407 99.125,67.407 ; 96.066,72.487 99.125,72.487 ; 96.066,77.567 99.125,77.567 ; 96.066,82.647 99.125,82.647 ; 96.066,87.727 99.125,87.727 ; 101.665,42.007 101.665,87.727 ; 104.205,42.007 104.205,87.727 ; 104.205,82.647 116.005,82.647 ; 108.745,82.647 108.766,87.727 ; 116.005,42.007 116.005,87.727 ; 118.545,42.007 118.545,87.727 ; 121.085,42.007 124.006,42.007 ; 121.085,47.087 124.006,47.087 ; 121.085,52.167 124.006,52.167 ; 121.085,57.247 124.006,57.247 ; 121.085,62.327 124.006,62.327 ; 121.085,67.407 124.006,67.407 ; 121.085,72.487 124.006,72.487 ; 121.085,77.567 124.006,77.567 ; 121.085,82.647 124.006,82.647 ; 121.085,87.727 124.006,87.727
  other v1: 82.779,48

## Other copper
Top Layer:
  rectangle: 143.708,61.908 147.108,76.308
  rectangle: 140.708,61.908 145.008,69.908
Bottom Layer:
  rectangle: 131.208,62.408 149.808,76.408
Multi-Layer:
  lines w0.254: 27.478,40.962 57.778,40.962 ; 27.478,89.662 57.778,89.662 ; 94.905,40.527 125.205,40.527 ; 94.905,89.227 125.205,89.227 ; 127.608,40.708 157.908,40.708 ; 127.608,89.408 157.908,89.408